# Altium PCB E17-09-PCU.PcbDoc
Units mm, origin at the board's own origin, x right, y up, seen from the top; angles counter-clockwise.
Board outline 174.6 x 64.6 mm, 2 copper layers (Top Layer, Bottom Layer), stack 1.64 mm thick; 6 components, 5 nets, 69 pads, 0 vias.
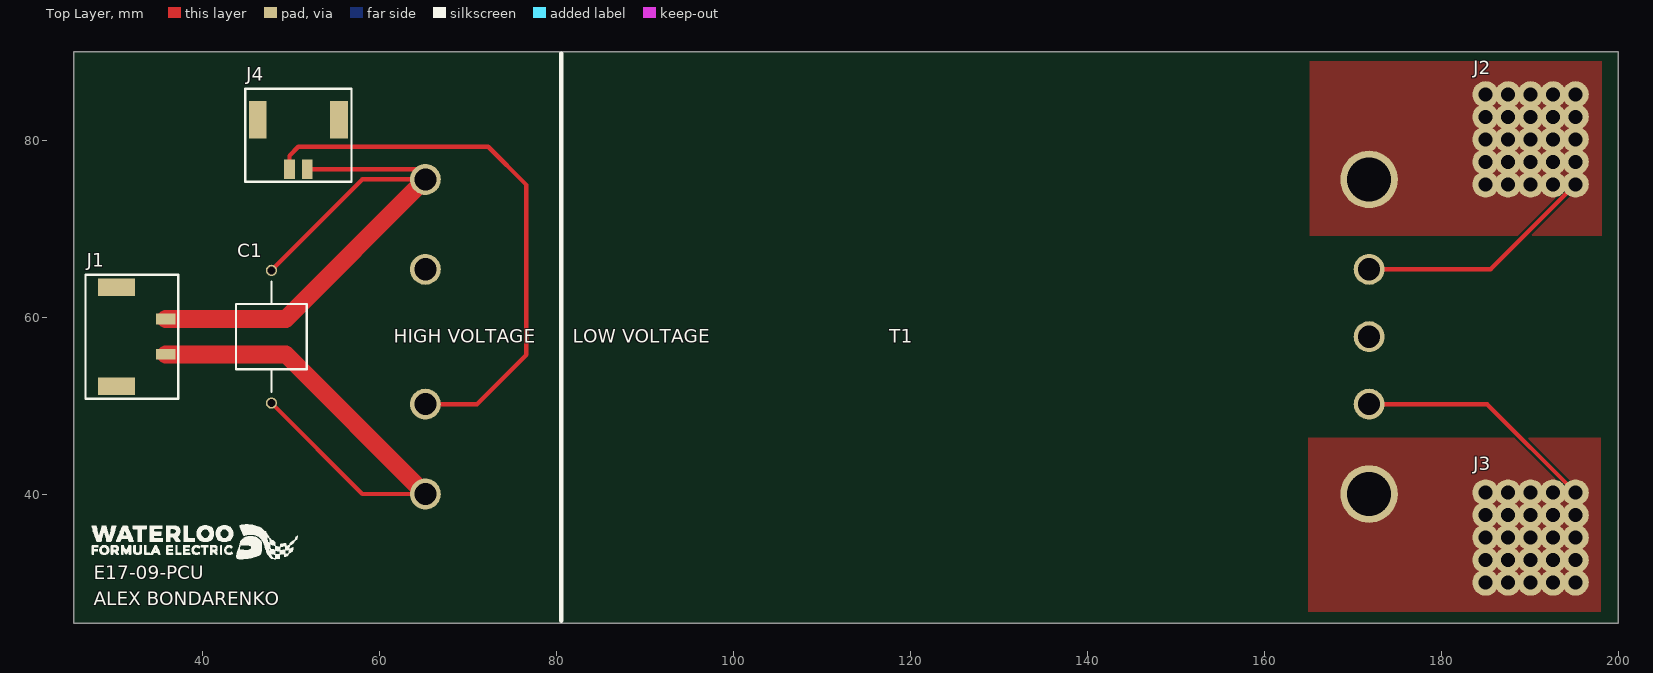
[diagram p0: Top Layer view]
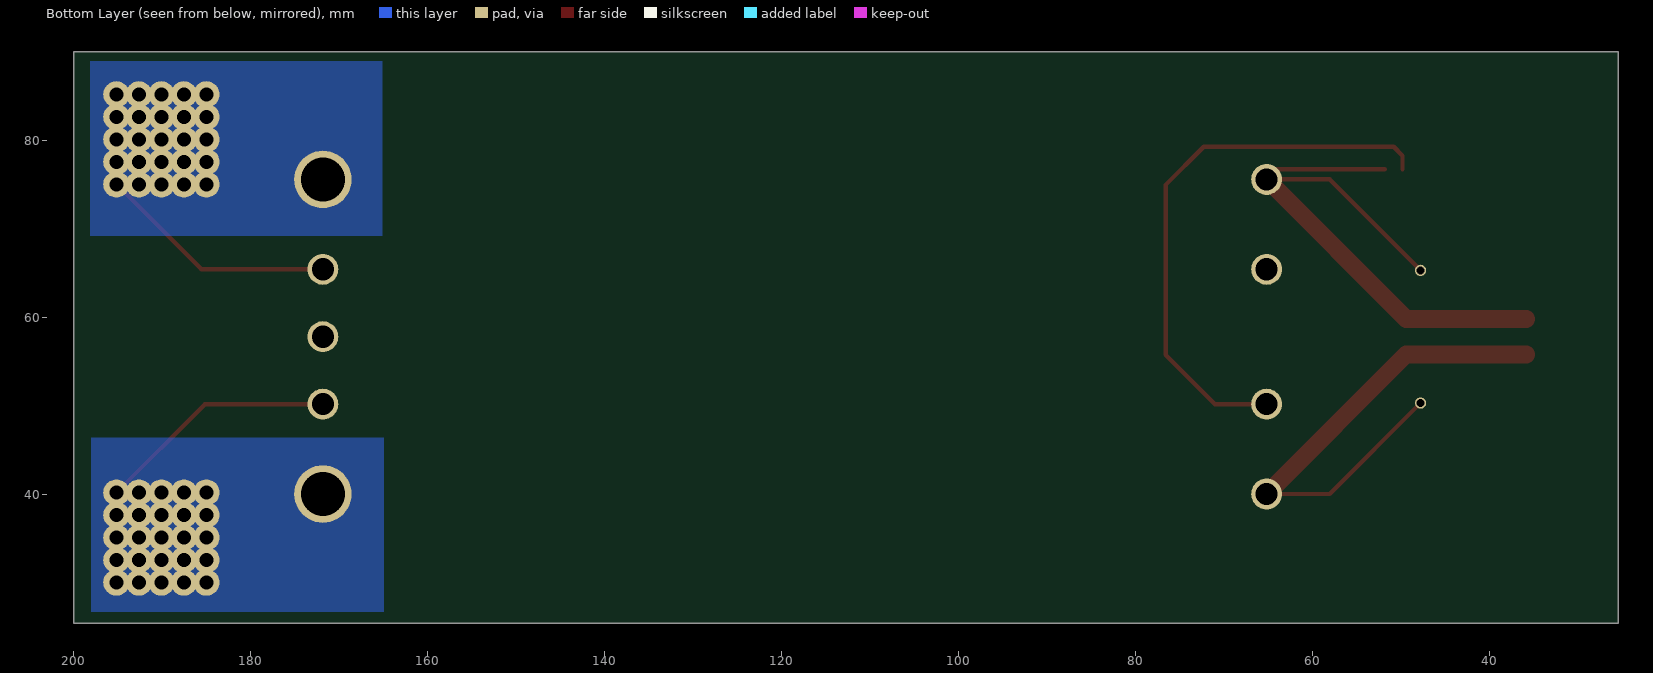
[diagram p1: Bottom Layer view, seen from below]
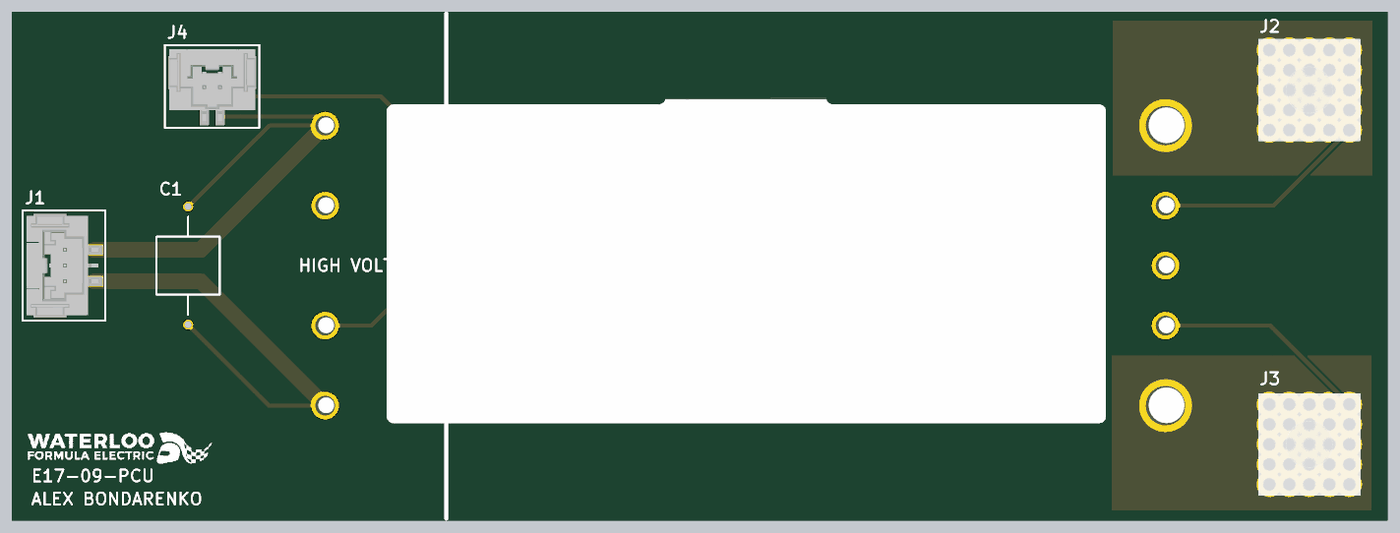
[diagram p2: 3D render of the assembled board from above, using the file's embedded part models]

## Layer stack, top to bottom
Top Solder: solder mask 0.0102, Solder Resist, Dk 3.5
Top Layer: signal copper 0.07
Dielectric 1: dielectric 1.5, FR-4, Dk 4.8
Bottom Layer: signal copper 0.07
Bottom Solder: solder mask 0.0102, Solder Resist, Dk 3.5

## Board outline
25.4,25.4 200,25.4 200,90 25.4,90

## Design rules (kind name [scope] priority, off if disabled: settings)
Clearance [All] p1: gap=0.254 ignorepadtopadclearanceinfootprint=FALSE except(0: Arc-Hole Track-Hole SMDPad-Hole THPad-Hole Via-Hole Fill-Hole Poly-Hole Region-Hole Text-Hole)
PlaneConnect [All] p1: planeconnectstyle=Direct reliefexpansion=0.508 reliefentries=4 reliefconductorwidth=1 reliefairgap=0.254
PolygonConnect [All] p1: connectstyle=Direct reliefconductorwidth=0.254 reliefentries=4 polygonreliefangle="90 Angle" airgapwidth=0.254
RoutingVias [All] p1: holewidth=0.711 width=1.27 viastyle="Through Hole" minholewidth=0.711 minwidth=1.27 maxholewidth=0.711 maxwidth=1.27
SolderMaskExpansion [All] p1: expansion=0.102
Width [All] p1: maxlimit=2 minlimit=0.254 preferedwidth=0.254 minimp=50.000000 maximp=50.000000 favimp=50.000000
29 further rules are at their usual default settings.

## Components (designator, comment, footprint, x,y, rotation, side; value= is the part's Value field where it differs from the comment)
C1 "Cap" B32922H3204 47.752,50.28 r90 top value=.2uF
J1 "560020-0322_HV" "MOLEX_DURACLIK_3 RED - VERT  HV" 30.226,57.78 r270 top
J2 "7461098" 7461098 185,75 r90 top
J3 "7461098" 7461098 185,30 r90 top
J4 "560020-0222" "MOLEX_DURACLIK_2 RED VERT" 50.8,82.296 r180 top
T1 "DC to DC" PCBComponent_1 65.151,40 r0 top

## Footprints (in the part's own frame and the unit in brackets; to place one, negate y for a bottom-side part, rotate by r counter-clockwise, add the part's x,y. Pads: shape width x height; smd on the part's side, far side on the other; paste and mask are expansions set on the pad)
7461098 [mm] "POWER ELEMENT SHANK M6 25PIN"
  round 3 hole 1.6: 1(0,0) 1(0,-2.54) 1(0,-5.08) 1(0,-7.62) 1(0,-10.16) 1(2.54,-2.54) 1(2.54,0) 1(2.54,-7.62) 1(2.54,-5.08) 1(2.54,-10.16) 1(5.08,-5.08) 1(5.08,-2.54) 1(5.08,0) 1(5.08,-10.16) 1(5.08,-7.62) 1(7.62,-10.16) 1(7.62,-7.62) 1(7.62,-5.08) 1(7.62,-2.54) 1(7.62,0) 1(10.16,-10.16) 1(10.16,-7.62) 1(10.16,-5.08) 1(10.16,-2.54) 1(10.16,0)
  body extent -1.42,-11.58 11.58,1.42, height 15.5
B32922H3204 [mm]
  round 1.27 hole 0.9: 1(0,0) 2(15,0)
  silkscreen extent 1.27,-4 13.73,4
"MOLEX_DURACLIK_2 RED VERT" [mm] "2 Positions Header, Shrouded Connector 0.079\" (2.00mm) Surface Mount, Right Angle Tin"
  rect 2x4.2 smd: 0(-4.6,0) 0(4.6,0)
  rect 1.2x2.2 smd: 1(1,5.58) 2(-1,5.58)
  silkscreen extent -6,-3.5 6,7, body extent -5.45,-3 5.45,6.15, height 8
"MOLEX_DURACLIK_3 RED - VERT  HV" [mm] "2 Positions Header, Shrouded Connector 0.079\" (2.00mm) Surface Mount, Right Angle Tin"
  rect 2x4.2 smd: 0(-5.6,0) 0(5.6,0)
  rect 1.2x2.2 smd: 1(2,5.58) 3(-2,5.58)
  silkscreen extent -7,-3.5 7,7, body extent -6.3,-3 6.3,6.15, height 8
PCBComponent_1 [mm]
  round 3.5 hole 2.5: 1(0,0) 2(0,10.16) 3(0,25.4) 4(0,35.56) 6(106.68,25.4) 7(106.68,17.78) 8(106.68,10.16)
  round 6.5 hole 5: 5(106.68,35.56) 9(106.68,0)
  body extent -4.95,-10.11 111.89,45.77, height 3.09

## Part data
C1: "Capacitor", LatestRevisionDate=17-Jul-2002, LatestRevisionNote="Re-released for DXP Platform.", PackageReference=C1206, Published=8-Jun-2000, Publisher="Altium Limited"
J1: "MOLEX DURACLIK 3-PIN VERT RED HV", COLOR=RED, CURRENT=3, MANUFACTURER=MOLEX, MPN=560020-0322, Voltage=250, Digikey_PN="Not in production", ORIENTATOIN=VERT, PLATING="Tin (Sn)", POSITIONS=2, SERIES=Duraclik, UL=94V-0
J2 J3: "POWER ELEMENT SHANK M6 25PIN", Supplier Part Number 1=732-3278-ND, MFG NOTE="Need to dimension", Supplier 1=Digi-Key
J4: "MOLEX DURACLIK 2-PIN VERT RED", COLOR=RED, CURRENT=3, MANUFACTURER=MOLEX, Voltage=125, Digikey_PN="Not in production", MPN=560020-0222, ORIENTATOIN=VERT, PLATING="Tin (Sn)", POSITIONS=2, SERIES=Duraclik, UL=94V-0
T1: "Isolated DC/DC Converters Maxi Family - Vin - 150, Vout - 12, Power - 500, Product Grade - C", Digikey PN=1102-1229-ND, PN=V150A12C500BL

## Nets (pads, with @x,y where several pads share a name; then routed paths per layer and width w, separated by ;. In a path a pad name is that pad's centre, name@x,y a point inside that pad or via, vN(x,y) a via of type N, cw(c..) or ccw(c..) an arc to the next point about the centre after c; other vN are vias at no path point)
HV+: C1.1 J1.1 T1.1 | length 57.5
  Top Layer w0.5: C1.1 58.032,40 T1.1
  Top Layer w2: J1.1 49.371,55.78 T1.1
HV-: C1.2 J1.3 J4.2 T1.4 | length 71.4
  Top Layer w0.5: C1.2 58.032,75.56 T1.4 63.995,76.716 J4.2
  Top Layer w2: J1.3 49.371,59.78 T1.4
NetJ2_1: J2.1 T1.5 T1.6 | length 27.3
  Top Layer w0.5: T1.6 185.56,65.4 J2.1@195.16,75
NetJ3_1: J3.1 T1.8 T1.9 | length 27.5
  Top Layer w0.5: T1.8 185.16,50.16 J3.1@195.16,40.16
NetJ4_1: J4.1 T1.2 | length 63.4
  Top Layer w0.5: J4.1 49.8,78.248 50.8,79.248 72.263,79.248 76.581,74.93 76.581,55.753 70.988,50.16 T1.2
pads on no net: J1.0 J4.0 T1.3 T1.7

## Polygon pours and split planes (outlines as drawn)
NetJ3_1 on Top Layer "NETJ3_1_L01_P006" (solid, pour order 6): 197.993,46.355 197.993,26.67 164.973,26.67 164.973,46.355
NetJ2_1 on Top Layer "NETJ2_1_L01_P000" (solid, pour order 0): 198.12,88.9 198.12,69.215 165.1,69.215 165.1,88.9
NetJ3_1 on Bottom Layer "NETJ3_1_L02_P004" (solid, pour order 4): 197.993,26.67 197.993,46.355 164.973,46.355 164.973,26.67
NetJ2_1 on Bottom Layer "NETJ2_1_L02_P002" (solid, pour order 2): 198.12,69.215 198.12,88.9 165.1,88.9 165.1,69.215

## Silkscreen, mask and mechanical layers (free items; w line width, h text height)
Top Overlay:
  drawing of 1117 lines, arcs and shapes, not listed
  text "HIGH VOLTAGE" at 61.595,57.074 h1.52
  text "LOW VOLTAGE" at 81.788,57.074 h1.52
  text "E17-09-PCU" at 27.688,30.357 h1.52
  text "ALEX BONDARENKO" at 27.688,27.432 h1.52
Mechanical 1:
  the board outline again, w0.254